# EAGLE board Паяльник2 (EAGLE 7.5.0)
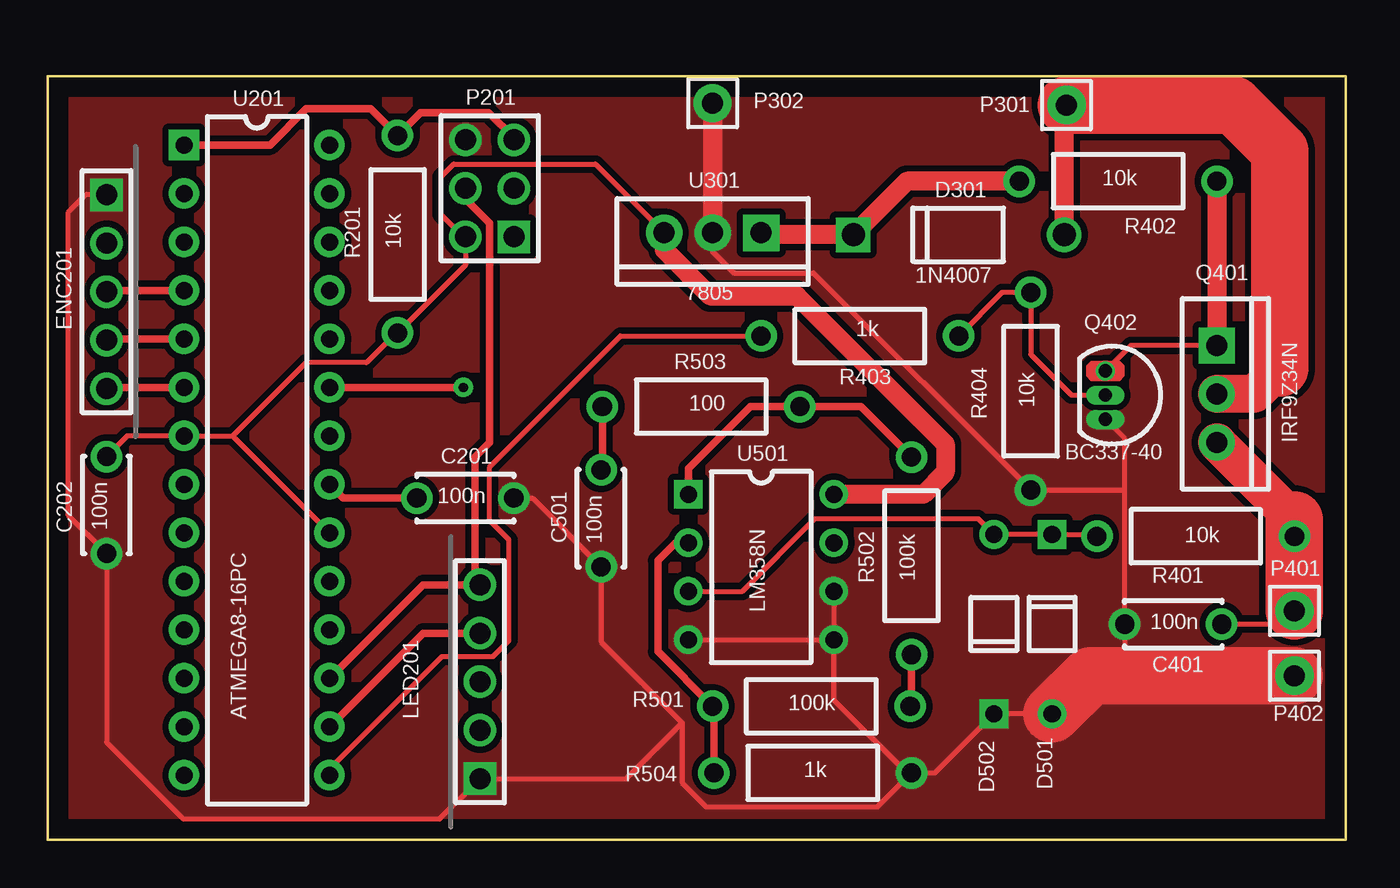
[diagram p0: board, top side]
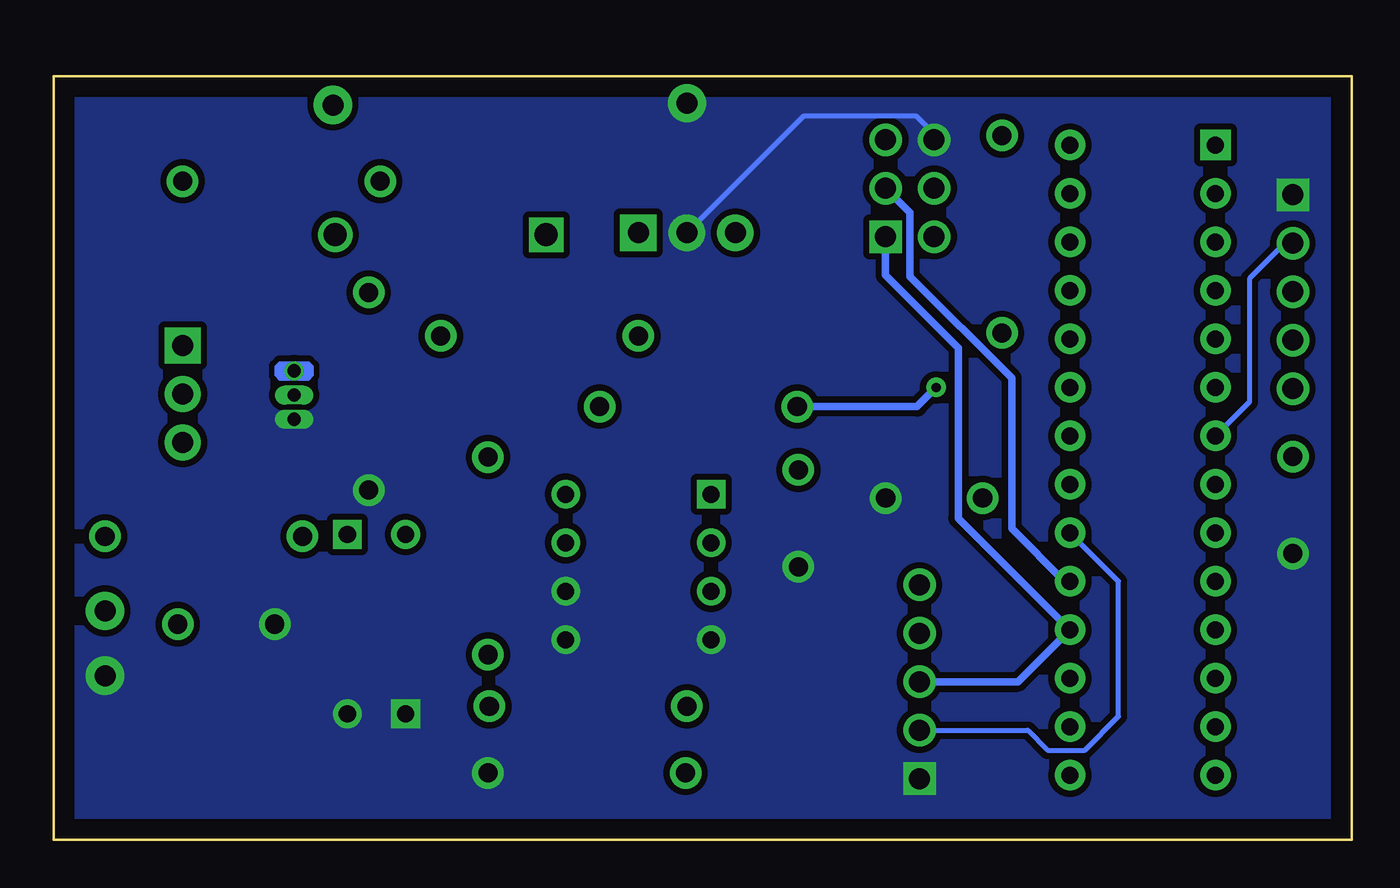
[diagram p1: board, bottom side, seen from below]

Size 68 x 40 mm. Coordinates in mm from the lower left corner, seen from the top.
Outline: 0,0 68,0 68,40 0,40 0,0
Copper layers (1*16): F.Cu 0.035mm / dielectric 1.5mm / B.Cu 0.035mm
Design rules "default *": minimum track width 10mil, minimum drill 0.61mm, track to track 8mil, track to pad 8mil, pad to pad 8mil, via to via 8mil, smd to smd 8mil, copper to edge 40mil, drill to drill 8mil, minimum pad ring 0mil, minimum via ring 8mil, stop-mask expansion 4mil, vias tented up to drill 20mil, thermal gap 10mil
Net classes: 0 Default: width 0.4 mm, clearance 0.4 mm, clearance 0.4 mm to class 1, clearance 0.4 mm to class 2; 1 kicad_default: width 0.254 mm, clearance 0.254 mm, clearance 0.254 mm to class 0, clearance 0.254 mm to class 2; 2 NetClass2: width 0.5 mm, clearance 0.4 mm, clearance 0.4 mm to class 0, clearance 0.4 mm to class 1

## Footprints (pad centres in the part's own frame; a part is rotated, then mirrored left to right if it is on the bottom)
CAP-5.08/5.1x2.5 = drill 1 pad 1.65: 1 -2.54,0; 2 2.54,0
CAP-5.08/5.1x2.5_C202 = drill 1 pad 1.65: 1 -2.54,0; 2 2.54,0
DO-41 = drill 1.2 pad 1.8 square: 1 -5.525,0 | drill 1.2 pad 1.8: 2 5.525,0
R-1 = drill 0.9 pad 1.5 square: 1 -4.7,0 | drill 0.9 pad 1.5: 2 4.7,0
HDR-1x5T/2.54/12x2 = drill 1.1 pad 1.7 square: 1 -5.08,0 | drill 1.1 pad 1.7: 2 -2.54,0; 3 0,0; 4 2.54,0; 5 5.08,0
HDR-2x3T/2.54x2.54/8x5 = drill 1.1 pad 1.7 square: 1 -2.54,-1.27 | drill 1.1 pad 1.7: 2 -2.54,1.27; 3 0,-1.27; 4 0,1.27; 5 2.54,-1.27; 6 2.54,1.27
1PIN = drill 1.1 pad 2: 1 0,0
TO-220 = drill 1.1 pad 1.9 square: 1 -2.54,0 | drill 1.1 pad 1.9: 2 0,0; 3 2.54,0
TO-92 = drill 0.7 pad 1: 1 -1.27,0 | drill 0.7 pad 1 long: 2 0,0; 3 1.27,0
RES-10.35/6.8x2.8 = drill 1 pad 1.65: 1 -5.175,0; 2 5.175,0
RES-10.35/6.8x2.8_R401 = drill 1 pad 1.65: 1 -5.175,0; 2 5.175,0
DIP-28 = drill 0.9 pad 1.6 square: 1 -3.81,16.51 | drill 0.9 pad 1.6: 2 -3.81,13.97; 3 -3.81,11.43; 4 -3.81,8.89; 5 -3.81,6.35; 6 -3.81,3.81; 7 -3.81,1.27; 8 -3.81,-1.27; 9 -3.81,-3.81; 10 -3.81,-6.35; 11 -3.81,-8.89; 12 -3.81,-11.43; 13 -3.81,-13.97; 14 -3.81,-16.51; 15 3.81,-16.51; 16 3.81,-13.97; 17 3.81,-11.43; 18 3.81,-8.89; 19 3.81,-6.35; 20 3.81,-3.81; 21 3.81,-1.27; 22 3.81,1.27; 23 3.81,3.81; 24 3.81,6.35; 25 3.81,8.89; 26 3.81,11.43; 27 3.81,13.97; 28 3.81,16.51
TO-220_U301 = drill 1.1 pad 1.9 square: 1 -2.54,0 | drill 1.1 pad 1.9: 2 0,0; 3 2.54,0
DIP-8 = drill 0.9 pad 1.5 square: 1 -3.81,3.81 | drill 0.9 pad 1.5: 2 -3.81,1.27; 3 -3.81,-1.27; 4 -3.81,-3.81; 5 3.81,-3.81; 6 3.81,-1.27; 7 3.81,1.27; 8 3.81,3.81

## Placement (x,y rotation side)
C201  100n  [CAP-5.08/5.1x2.5]  21.88,17.9 180 top
C202  100n  [CAP-5.08/5.1x2.5_C202]  3.08,17.54 90 top
C401  100n  [CAP-5.08/5.1x2.5]  58.96,11.3 0 top
C501  100n  [CAP-5.08/5.1x2.5_C202]  28.99,16.84 90 top
D301  1N4007  [DO-41]  47.72,31.7 0 top
D501  DIODE-10MM  [R-1]  52.61,11.3 270 top
D502  DIODE-10MM  [R-1]  49.56,11.3 90 top
ENC201  644456-5  [HDR-1x5T/2.54/12x2]  3.08,28.72 270 top
LED201  644456-5  [HDR-1x5T/2.54/12x2]  22.64,8.28 90 top
P201  3X2_PIN_VERT  [HDR-2x3T/2.54x2.54/8x5]  23.15,34.14 90 top
P301  CON_1PIN  [1PIN]  53.37,38.5 90 top
P302  CON_1PIN  [1PIN]  34.83,38.6 90 top
P401  Zhalo  [1PIN]  65.31,12 90 top
P402  GND  [1PIN]  65.31,8.6 0 top
Q401  IRF9Z34N  [TO-220]  61.25,23.36 270 top
Q402  BC337-40  [TO-92]  55.4,23.3 270 top
R201  10k  [RES-10.35/6.8x2.8]  18.32,31.73 270 top
R401  10k  [RES-10.35/6.8x2.8_R401]  60.13,15.9 180 top
R402  10k  [RES-10.35/6.8x2.8_R401]  56.07,34.5 180 top
R403  1k  [RES-10.35/6.8x2.8_R401]  42.54,26.4 0 top
R404  10k  [RES-10.35/6.8x2.8]  51.5,23.5 90 top
R501  100k  [RES-10.35/6.8x2.8_R401]  40,7 0 top
R502  100k  [RES-10.35/6.8x2.8]  45.24,14.88 90 top
R503  100  [RES-10.35/6.8x2.8_R401]  34.23,22.7 180 top
R504  1k  [RES-10.35/6.8x2.8_R401]  40.07,3.5 180 top
U201  ATMEGA8-16PC  [DIP-28]  10.95,19.89 0 top
U301  7805  [TO-220_U301]  34.83,31.8 180 top
U501  LM358N  [DIP-8]  37.37,14.29 0 top

## Library data of the parts
C201 = common; HIERARCHY: Block2 C201
C202 = common; HIERARCHY: Block2 C202
C401 = common; HIERARCHY: Block1 Block101 C401
C501 = common; HIERARCHY: Block1 Block103 C501
D301 = common; HIERARCHY: Block1 Block102 D301
D501 = common; HIERARCHY: Block1 Block103 D501
D502 = common; HIERARCHY: Block1 Block103 D502
ENC201 = common; DATASHEET: http://datasheets.diptrace.com/con_headers/ENG_CD_644456_D2.pdf; HIERARCHY: Block2 ENC201; MANUFACTURER: TE Connectivity
LED201 = common; DATASHEET: http://datasheets.diptrace.com/con_headers/ENG_CD_644456_D2.pdf; HIERARCHY: Block2 LED201; MANUFACTURER: TE Connectivity
P201 = common; DATASHEET: http://datasheets.diptrace.com\con_headers\901310126_sd.pdf; HIERARCHY: Block2 P201; MANUFACTURER: Molex
P301 = common; ATTR_1: Male; ATTR_2: Plug; DESCRIPTION: Contact; HIERARCHY: Block1 Block102 P301
P302 = common; ATTR_1: Male; ATTR_2: Plug; DESCRIPTION: Contact; HIERARCHY: Block1 Block102 P302
P401 = common; ATTR_1: Male; ATTR_2: Plug; DESCRIPTION: Contact; HIERARCHY: Block1 Block101 P401
P402 = common; ATTR_1: Male; ATTR_2: Plug; DESCRIPTION: Contact; HIERARCHY: Block1 Block101 P402
Q401 = common; HIERARCHY: Block1 Block101 Q401; MANUFACTURER: IR
Q402 = common; DATASHEET: http://datasheets.diptrace.com/motorola/BC337_8.pdf; HIERARCHY: Block1 Block101 Q402; MANUFACTURER: Motorola
R201 = common; HIERARCHY: Block2 R201
R401 = common; HIERARCHY: Block1 Block101 R401
R402 = common; HIERARCHY: Block1 Block101 R402
R403 = common; HIERARCHY: Block1 Block101 R403
R404 = common; HIERARCHY: Block1 Block101 R404
R501 = common; HIERARCHY: Block1 Block103 R501
R502 = common; HIERARCHY: Block1 Block103 R502
R503 = common; HIERARCHY: Block1 Block103 R503
R504 = common; HIERARCHY: Block1 Block103 R504
U201 = common; HIERARCHY: Block2 U201; MANUFACTURER: Atmel; VALUE: ATmega8-16PC
U301 = common; HIERARCHY: Block1 Block102 U301; MANUFACTURER: Atmel
U501 = common; DATASHEET: http://datasheets.diptrace.com/motorola/LM158_258_358_2904.pdf; HIERARCHY: Block1 Block103 U501; MANUFACTURER: Motorola

## Nets
+5V [kicad_default]: C202.2 ENC201.2 LED201.2 P201.2 R201.2 U201.7 U201.20 U301.3 U501.8
+25V [kicad_default]: D301.2 P301.1 Q401.2
+25V_D [kicad_default]: D301.1 R402.2 U301.1
Clk: LED201.4 U201.16
GND_A [kicad_default]: C201.1 C202.1 C401.1 C501.1 D501.2 D502.1 ENC201.1 LED201.1 P201.6 P302.1 P402.1 Q402.3 R404.1 R504.1 U301.2 U501.4 U501.5 U501.6
LM358-analog: C501.2 R503.2 U201.23
Miso: LED201.3 P201.1 U201.18
Mosi: LED201.5 P201.4 U201.17
Net_4 [kicad_default]: Q401.1 Q402.1 R402.1
Net_6 [kicad_default]: Q402.2 R403.2 R404.2
Net_17 [kicad_default]: C401.2 P401.1 Q401.3 R401.1
Net_19: R501.1 R504.2 U501.2
Net_20: R502.2 R503.1 U501.1
PWM [kicad_default]: R403.1 U201.15
Reset: P201.5 R201.1 U201.1
Sck: P201.3 U201.19
Tip_S [kicad_default]: D501.1 D502.2 R401.2 U501.3
Сеть_3: ENC201.3 U201.4
Сеть_4: ENC201.4 U201.5
Сеть_5: ENC201.5 U201.6
Сеть_24: R501.2 R502.1
Сеть_27: C201.2 U201.21

## Tracks (layer width: path | path; a pad name or v marks a point on that pad's centre or on a via)
+5V
  F.Cu 0.254: C202.2 4.16,21.16 U201.7 9.68,21.16 | 9.68,21.16 U201.20 | 9.68,21.16 13.52,25 16.7,25 18.25,26.55 R201.2 21.88,30.11 P201.2 21.75,31.6 20.61,32.75 20.61,34.74 21.27,35.4 28.69,35.4 U301.3
  F.Cu 1: U301.3 32.29,30.91 34.7,28.5 39.26,28.5 47.02,20.74 47.02,19.26 45.86,18.1 U501.8
  B.Cu 0.254: ENC201.2 3.51,31.26 5.37,29.4 5.37,22.94 U201.7 | LED201.2 16.97,5.74 15.93,4.7 13.99,4.7 12.22,6.46 12.22,13.54 U201.20
+25V
  F.Cu 1: D301.2 53.25,38.37 P301.1
  F.Cu 2: 64.55,24.71 63.2,23.36 Q401.2
  F.Cu 3: P301.1 62.13,38.5 64.55,36.08 64.55,24.71
+25V_D
  F.Cu 1: U301.1 37.47,31.7 D301.1 45,34.5 R402.2
Clk
  F.Cu 0.4: LED201.4 19.66,10.82 U201.16
GND_A
  F.Cu 0.254: U501.6 U501.5 | U501.4 U501.5 | U501.5 | R504.1 45,3.5 41.18,7.32 U501.5 | D501.2 D502.1 | D502.1 | R504.1 46.46,3.5 D502.1 | 33.23,6.13 28.99,10.38 C501.1 25.39,17.9 C201.1 | 33.23,6.13 33.23,2.99 34.49,1.73 43.47,1.73 R504.1 | 56.42,8.6 C401.1 56.42,18.32 | 56.42,18.32 56.42,21.01 Q402.3 | 56.42,18.32 R404.1 40.12,29.7 35.94,29.7 34.83,30.81 U301.2 | 33.23,6.13 30.3,3.2 LED201.1 20.54,1.1 7.1,1.1 3.08,5.12 C202.1 1.05,17.03 1.05,32.85 1.99,33.8 ENC201.1
  F.Cu 1: P302.1 U301.2
  F.Cu 3: P402.1 56.42,8.6 54.61,8.6 D501.2
  B.Cu 0.254: P201.6 21.88,36.98 22.79,37.9 28.73,37.9 U301.2
  pour F.Cu (isolate 0.33, no thermals): 0.6,39.48 0.6,0.62 67.53,0.62 67.28,39.48
  pour B.Cu (isolate 0.33, no thermals): 0.86,39.58 0.86,0.62 67.78,0.82 67.03,39.68
LM358-analog  (via drill 0.49 pad 1.02)
  F.Cu 0.4: R503.2 29.05,19.44 C501.2 | U201.23 v21.78,23.7
  B.Cu 0.4: v21.78,23.7 22.78,22.7 R503.2
Miso
  B.Cu 0.4: LED201.3 17.48,8.28 U201.18 20.61,16.84 20.61,25.77 24.42,29.58 P201.1
Mosi
  F.Cu 0.4: U201.17 19.66,13.36 LED201.5 22.38,13.61 22.38,20.05 23.15,20.82 23.15,32.3 21.88,33.57 P201.4
Net_4
  F.Cu 0.254: Q401.1 56.73,25.9 Q402.1
  F.Cu 1: R402.1 Q401.1 | Q401.1
Net_6
  F.Cu 0.254: R403.2 49.99,28.68 R404.2 51.5,25.43 53.63,23.3 Q402.2
Net_17
  F.Cu 0.254: C401.2 64.61,11.3 P401.1
  F.Cu 2: 65.31,16.76 Q401.3
  F.Cu 3: P401.1 R401.1 | R401.1 | R401.1 65.31,16.76
Net_19
  F.Cu 0.4: R504.2 34.89,7 R501.1 31.96,9.87 31.96,14.63 32.89,15.56 U501.2
Net_20
  F.Cu 0.4: U501.1 33.56,19.45 36.81,22.7 R503.1 42.59,22.7 R502.2
PWM
  F.Cu 0.254: U201.15 14.76,3.71 20.65,9.6 23.32,9.6 24.16,10.45 24.16,15.72 23.15,16.74 23.15,19.54 30,26.4 R403.1
Reset
  F.Cu 0.4: U201.1 11.65,36.4 13.55,38.3 16.92,38.3 R201.1 19.52,38.1 23.09,38.1 24.42,36.78 P201.5
Sck
  B.Cu 0.4: U201.19 15.04,13.54 17.81,16.31 17.81,24.18 23.15,29.52 23.15,32.87 P201.3
Tip_S
  F.Cu 0.254: D502.2 D501.1 54.86,16 R401.2 | D502.2 | U501.3 36.38,13.02 40.19,16.83 48.73,16.83 D502.2
Сеть_3
  F.Cu 0.4: U201.4 3.14,28.78 ENC201.3
Сеть_4
  F.Cu 0.4: U201.5 3.14,26.24 ENC201.4
Сеть_5
  F.Cu 0.4: U201.6 3.14,23.7 ENC201.5
Сеть_24
  F.Cu 0.4: R501.2 45.24,7 R502.1
Сеть_27
  F.Cu 0.4: C201.2 15.48,17.9 U201.21